# Altium PCB PCB_SHERPA_MK_I.PcbDoc
Units mm, origin at the board's own origin, x right, y up, seen from the top; angles counter-clockwise.
Board outline 63.63 x 47.24 mm, 4 copper layers (Top Layer, Mid-Layer 1, Mid-Layer 2, Bottom Layer); 104 components, 104 nets, 405 pads, 102 vias.
Unrouted connection lines stored in the file: 1.
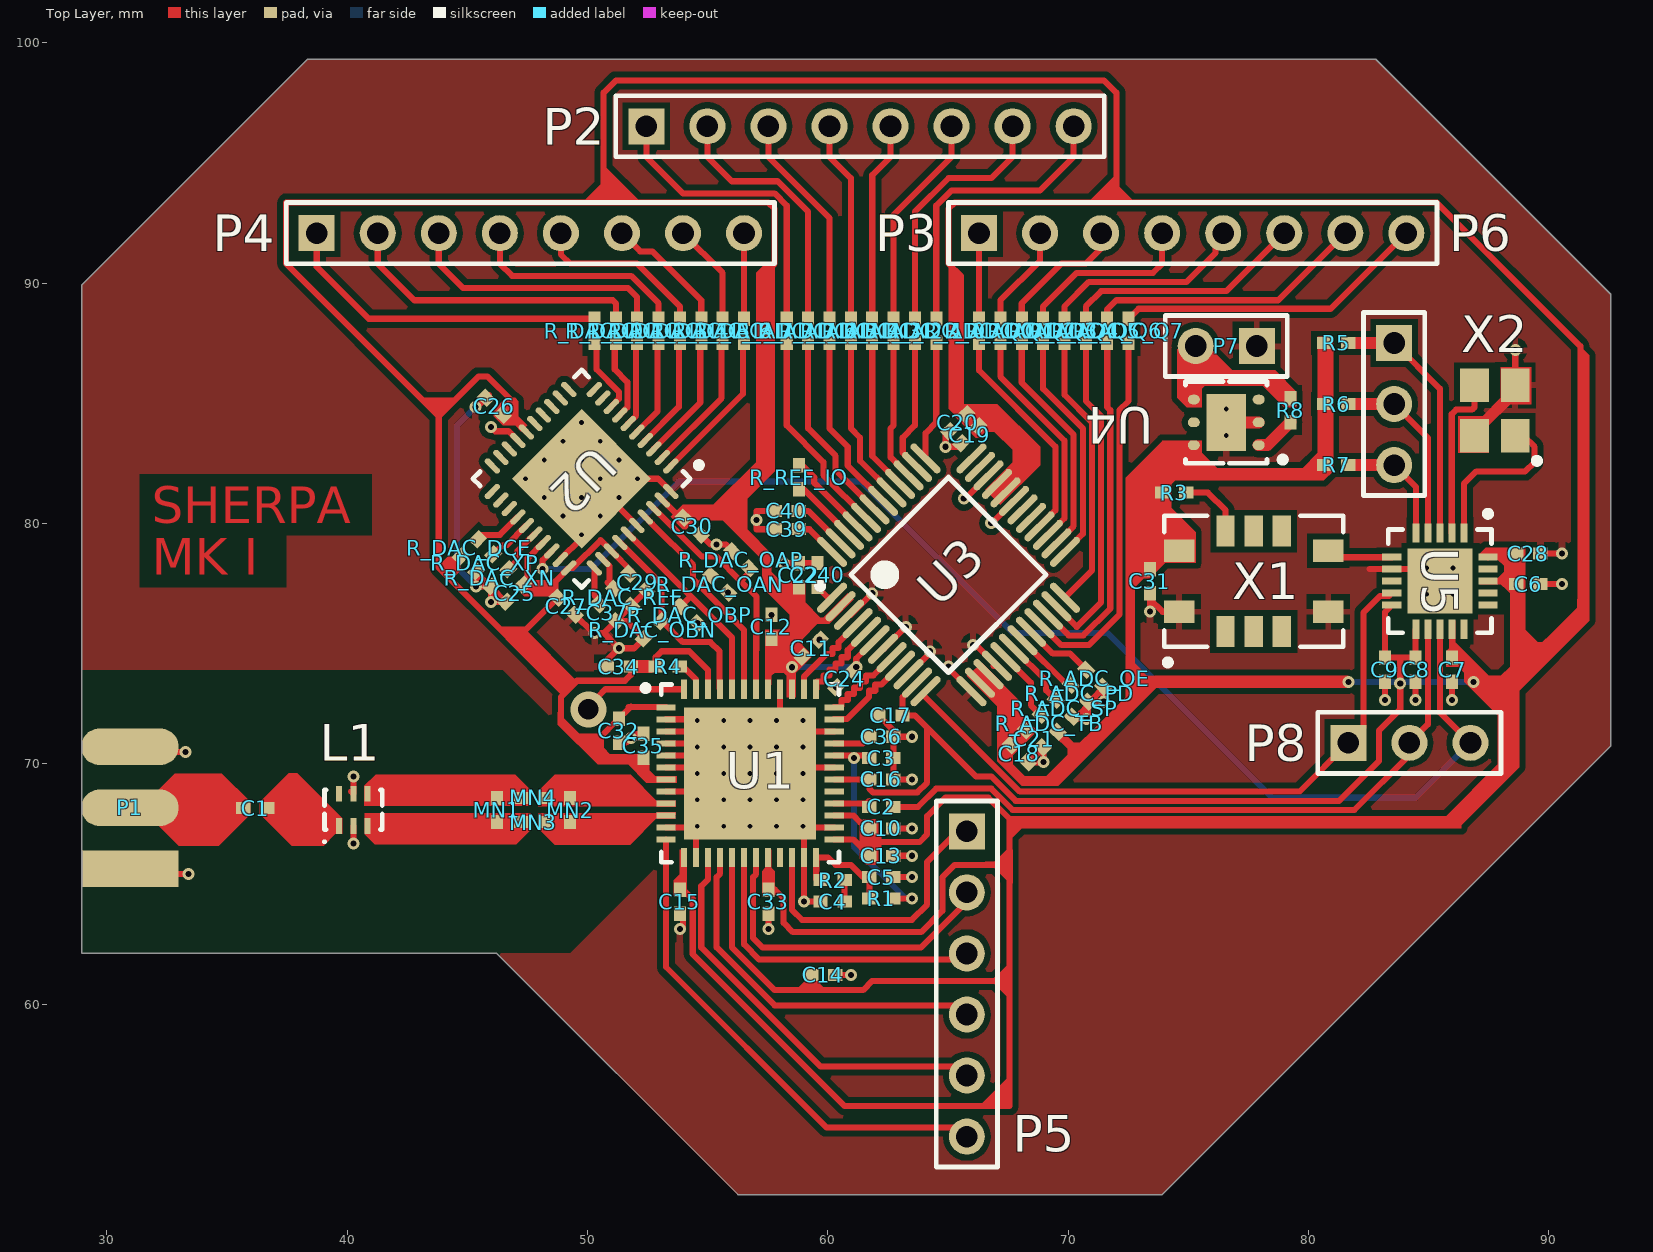
[diagram p0: Top Layer view]
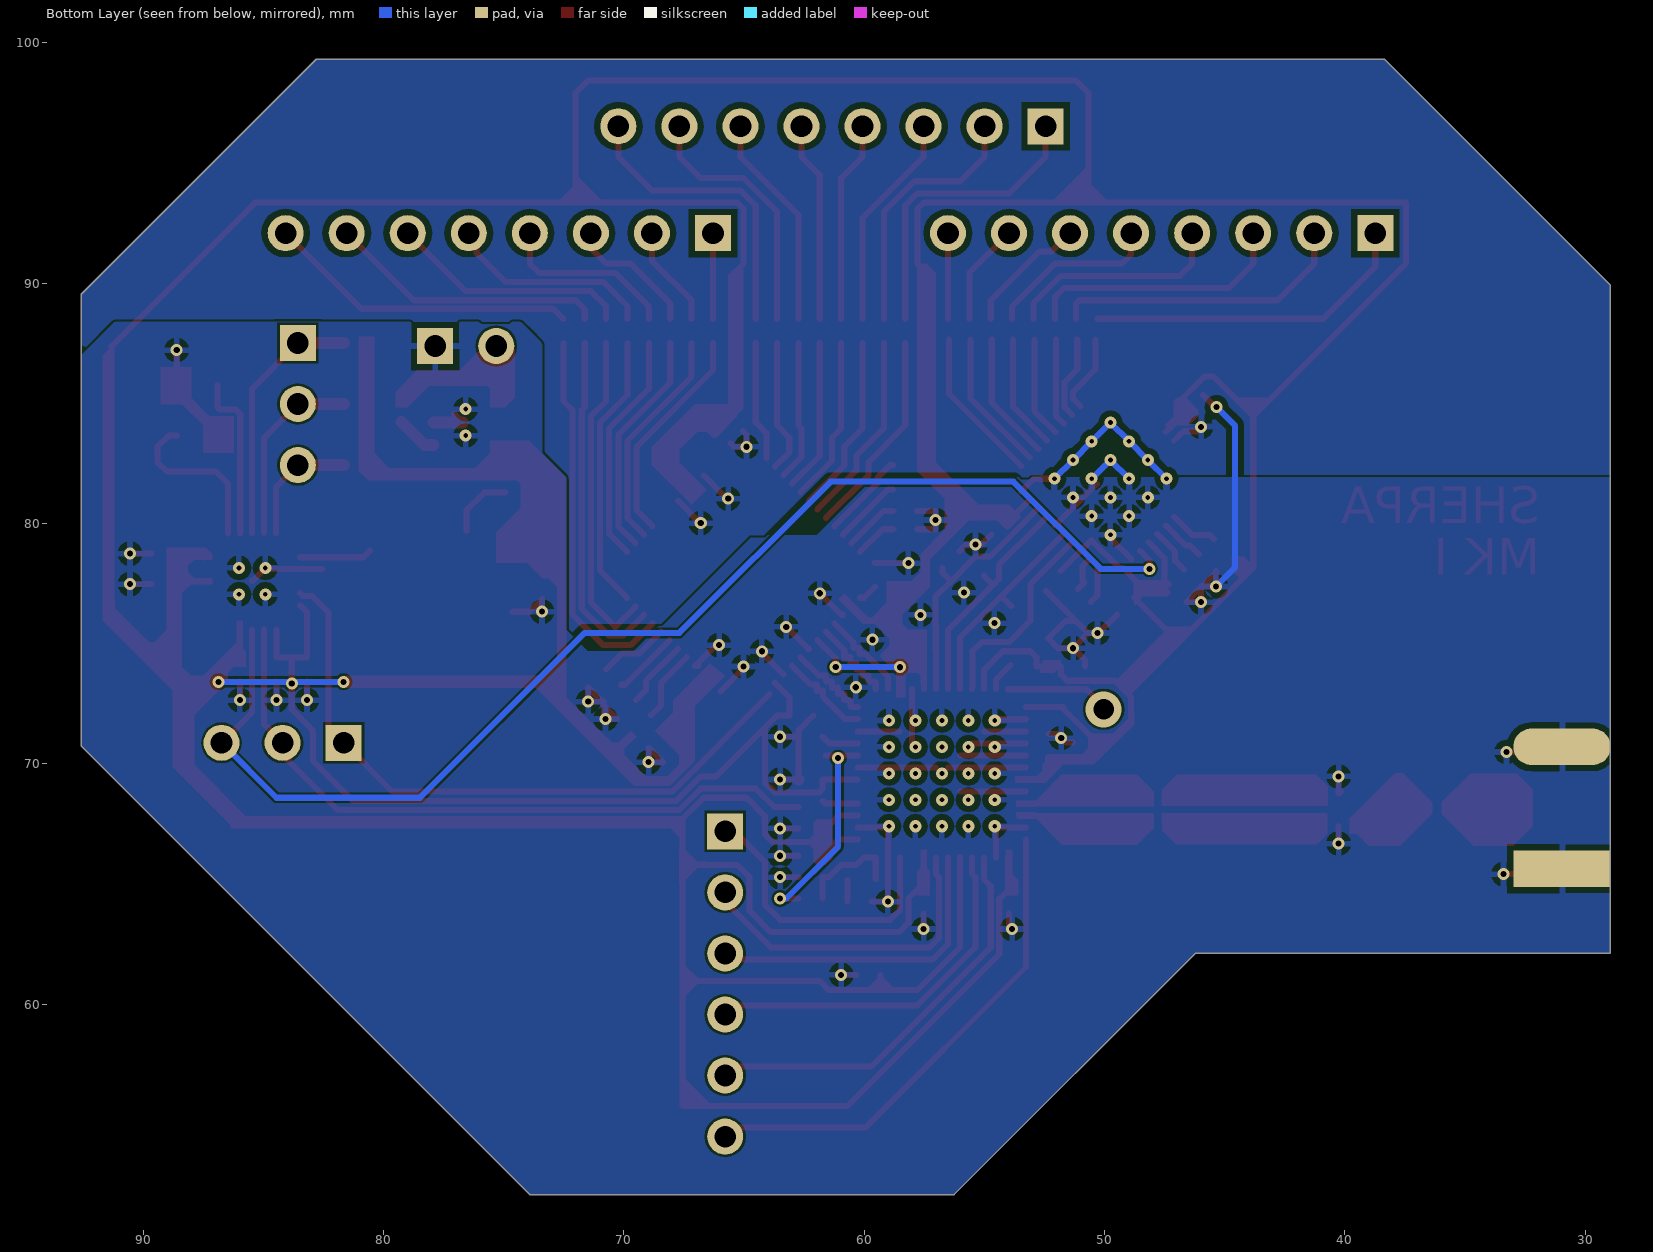
[diagram p1: Bottom Layer view, seen from below]

## Layer stack, top to bottom
Top Layer: signal copper 0.0356
Dielectric: core 0.32, FR-4, Dk 4.8
Mid-Layer 1: signal copper 0.0356
Dielectric: prepreg 0.32, FR-4, Dk 4.8
Mid-Layer 2: signal copper 0.0356
Dielectric: core 0.32, FR-4, Dk 4.8
Bottom Layer: signal copper 0.0356

## Board outline
28.956,87.376 28.956,89.916 38.354,99.314 80.899,99.314 82.804,99.314 92.583,89.535 92.583,70.739 73.914,52.07 56.261,52.07 46.228,62.103 28.956,62.103

## Design rules (kind name [scope] priority, off if disabled: settings)
Clearance [All] p1: gap=0.1
ComponentClearance [All] p1 off: gap=0.01 collisioncheckmode=3 verticalgap=0.254 showdistances=FALSE
DiffPairsRouting DiffPair_DiffPairsRouting_3 [InDifferentialPair ('ANT2')] p1: maxlimit=0.3 minlimit=0.1 mostfreqgap=0.3 midlayer1_mingap=0.254 midlayer1_maxgap=0.254 midlayer1_prefgap=0.254 midlayer2_mingap=0.254 midlayer2_maxgap=0.254 midlayer2_prefgap=0.254 maxuncoupledlength=12.7
MinimumSolderMaskSliver [All] p1 off: minsoldermaskwidth=0.1
PolygonConnect [All] p1: connectstyle=Relief reliefconductorwidth=0.254 reliefentries=4 polygonreliefangle="90 Angle" airgapwidth=0.254
RoomDefinition Schematic_SHERPA [InComponentClass('Schematic_SHERPA')] p1: confinementstyle=ConfineIn formatcopy=TRUE lockcomponents=FALSE outline 28.702,52.197 92.71,52.197 92.71,99.441 28.702,99.441
RoutingVias [All] p1 off: holewidth=0.711 width=1.27 viastyle="Through Hole" minholewidth=0.711 minwidth=1.27 maxholewidth=0.711 maxwidth=1.27
SilkToSolderMaskClearance [IsPad] p1 off: minsilkscreentomaskgap=0.1 clearancetoexposedcopper=TRUE
SolderMaskExpansion [All] p1: expansion=0.102
Width DiffPair_Width [InDifferentialPair('ANT2')] p1: maxlimit=1.3 minlimit=0.254 preferedwidth=1.3
Width [All] p2: maxlimit=5 minlimit=0.254 preferedwidth=0.254
24 further rules are at their usual default settings.

## Classes and differential pairs
differential pair ADC_IN_A: +ADC_IN_A_P -ADC_IN_A_N
differential pair ADC_IN_B: +ADC_IN_B_P -ADC_IN_B_N
differential pair DAC_OUT_A: +DAC_OUT_A_P -DAC_OUT_A_N
differential pair DAC_OUT_B: +DAC_OUT_B_P -DAC_OUT_B_N
differential pair CLK: +CLK_P -CLK_N
differential pair ANT2_BB: +ANT2_BB_P -ANT2_BB_N
differential pair ANT2: +ANT2_P -ANT2_N

## Components (designator, comment, footprint, x,y, rotation, side; value= is the part's Value field where it differs from the comment)
C1 "Cap Semi" 0402 36.171,68.155 r0 top
C2 "Cap Semi" 0402 62.23,68.199 r180 top
C3 "Cap Semi" 0402 62.23,70.231 r180 top
C4 "Cap Semi" 0402 60.198,64.262 r0 top
C5 "Cap Semi" 0402 62.23,65.278 r180 top
C6 "Cap Semi" 0402 89.154,77.47 r180 top
C7 "Cap Semi" 0402 85.979,73.914 r270 top
C8 "Cap Semi" 0402 84.455,73.914 r270 top
C9 "Cap Semi" 0402 83.185,73.914 r270 top
C10 "Cap Semi" 0402 62.23,67.31 r0 top
C11 "Cap Semi" 0402 59.309,74.803 r45 top
C12 "Cap Semi" 0402 57.658,75.692 r90 top
C13 "Cap Semi" 0402 62.23,66.167 r0 top
C14 "Cap Semi" 0402 59.817,61.214 r0 top
C15 "Cap Semi" 0402 53.848,64.262 r270 top
C16 "Cap Semi" 0402 62.23,69.342 r0 top
C17 "Cap Semi" 0402 62.611,72.009 r180 top
C18 "Cap Semi" 0402 67.963,70.409 r315 top
C19 "Cap Semi" 0402 65.913,83.685 r225 top
C20 "Cap Semi" 0402 65.405,84.193 r225 top
C21 "Cap Semi" 0402 68.586,71.043 r315 top
C22 "Cap Semi" 0402 58.801,77.843 r90 top
C24 "Cap Semi" 0402 60.706,73.533 r225 top
C25 "Cap Semi" 0402 46.972,77.096 r225 top
C26 "Cap Semi" 0402 46.132,84.866 r135 top
C27 "Cap Semi" 0402 49.127,76.558 r315 top
C28 "Cap Semi" 0402 89.154,78.74 r0 top
C29 "Cap Semi" 0402 52.091,77.545 r315 top
C30 "Cap Semi" 0402 54.356,79.883 r315 top
C31 "Cap Semi" 0402 73.406,77.597 r270 top
C32 "Cap Semi" 0402 51.308,71.374 r270 top
C33 "Cap Semi" 0402 57.531,64.262 r270 top
C34 "Cap Semi" 0402 51.308,74.041 r180 top
C35 "Cap Semi" 0402 52.324,70.739 r90 top
C36 "Cap Semi" 0402 62.23,71.12 r180 top
C37 "Cap Semi" 0402 50.833,76.288 r135 top
C39 "Cap Semi" 0402 58.293,79.756 r0 top
C40 "Cap Semi" 0402 58.293,80.518 r0 top
C240 "Cap Semi" 0402 59.563,77.851 r270 top
L1 "BALUN" BALUN 40.259,68.08 r90 top
MN1 "Cap Semi" 0402 46.228,68.072 r90 top
MN2 "Cap Semi" 0402 49.276,68.072 r90 top
MN3 "Cap Semi" 0402 47.752,67.564 r180 top
MN4 "Cap Semi" 0402 47.752,68.58 r180 top
P1 "SMA" "SMA Connector" 30.964,65.623 r90 top
P2 "Header 8" HDR1X8 52.451,96.52 r0 top
P3 "Header 8" HDR1X8 66.294,92.075 r0 top
P4 "Header 8" HDR1X8 38.735,92.075 r0 top
P5 "Header 6" HDR1X6 65.786,67.183 r270 top
P6 "Header 3" HDR1X3 83.566,87.503 r270 top
P7 "Header 2" HDR1X2 77.851,87.376 r180 top
P8 "Header 3" HDR1X3 81.661,70.866 r0 top
R1 "Res3" 0402 62.23,64.389 r0 top
R2 "Res3" 0402 60.198,65.151 r180 top
R3 "Res3" 0402 74.422,81.28 r180 top
R4 "Res3" 0402 53.34,74.041 r0 top
R5 "Res3" 0402 81.153,87.503 r0 top
R6 "Res3" 0402 81.153,84.963 r0 top
R7 "Res3" 0402 81.153,82.423 r0 top
R8 "Res3" 0402 79.248,84.709 r90 top
R_ADC_I0 "Res3" 0402 64.516,88.011 r270 top
R_ADC_I1 "Res3" 0402 63.627,88.011 r270 top
R_ADC_I2 "Res3" 0402 62.738,88.011 r270 top
R_ADC_I3 "Res3" 0402 61.849,88.011 r270 top
R_ADC_I4 "Res3" 0402 60.96,88.011 r270 top
R_ADC_I5 "Res3" 0402 60.071,88.011 r270 top
R_ADC_I6 "Res3" 0402 59.182,88.011 r270 top
R_ADC_I7 "Res3" 0402 58.293,88.011 r270 top
R_ADC_OE "Res3" 0402 71.101,73.557 r315 top
R_ADC_PD "Res3" 0402 70.472,72.929 r315 top
R_ADC_Q0 "Res3" 0402 66.294,88.011 r270 top
R_ADC_Q1 "Res3" 0402 67.183,88.011 r270 top
R_ADC_Q2 "Res3" 0402 68.072,88.011 r270 top
R_ADC_Q3 "Res3" 0402 68.961,88.011 r270 top
R_ADC_Q4 "Res3" 0402 69.85,88.011 r270 top
R_ADC_Q5 "Res3" 0402 70.739,88.011 r270 top
R_ADC_Q6 "Res3" 0402 71.628,88.011 r270 top
R_ADC_Q7 "Res3" 0402 72.517,88.011 r270 top
R_ADC_SP "Res3" 0402 69.844,72.3 r315 top
R_ADC_TB "Res3" 0402 69.215,71.672 r315 top
R_DAC_DCE "Res3" 0402 45.092,78.988 r225 top
R_DAC_I0 "Res3" 0402 50.292,88.011 r270 top
R_DAC_I1 "Res3" 0402 51.181,88.011 r270 top
R_DAC_I2 "Res3" 0402 52.07,88.011 r270 top
R_DAC_I3 "Res3" 0402 52.959,88.011 r270 top
R_DAC_I4 "Res3" 0402 53.848,88.011 r270 top
R_DAC_I5 "Res3" 0402 54.737,88.011 r270 top
R_DAC_I6 "Res3" 0402 55.626,88.011 r270 top
R_DAC_I7 "Res3" 0402 56.515,88.011 r270 top
R_DAC_OAN "Res3" 0402 55.499,77.47 r315 top
R_DAC_OAP "Res3" 0402 56.388,78.486 r135 top
R_DAC_OBN "Res3" 0402 52.705,75.565 r225 top
R_DAC_OBP "Res3" 0402 54.229,76.2 r315 top
R_DAC_REF "Res3" 0402 51.462,76.917 r315 top
R_DAC_XN "Res3" 0402 46.349,77.731 r225 top
R_DAC_XP "Res3" 0402 45.72,78.359 r225 top
R_REF_IO "Res3" 0402 58.801,81.915 r270 top
U1 "MAX2830" MAX2830 56.769,69.596 r0 top
U2 "MAX5851" MAX5851 49.756,81.856 r225 top
U3 "MAX1195" MAX1195 65.024,77.859 r45 top
U4 "LD39100PU33RY" LD39100PU33RY 76.581,84.201 r180 top
U5 "Si5351C" Si5351C 85.471,77.597 r270 top
X1 "7N-25.000MBP-T" 7N-25.000MBP-T 77.724,77.589 r90 top
X2 "XTAL" XTAL 87.757,84.701 r180 top

## Footprints (in the part's own frame and the unit in brackets; to place one, negate y for a bottom-side part, rotate by r counter-clockwise, add the part's x,y. Pads: shape width x height; smd on the part's side, far side on the other; paste and mask are expansions set on the pad)
7N-25.000MBP-T [mm]
  rect 1.28x0.76 smd: 1(-2.09,1.17) 2(-2.09,0) 3(-2.09,-1.17) 6(2.09,-1.17) 7(2.09,0) 8(2.09,1.17)
  rect 0.94x1.28 smd: 4(-1.27,-3.1) 5(1.27,-3.1) 9(1.27,3.1) 10(-1.27,3.1)
  silkscreen extent -3.5,-3.73 2.73,3.73, body extent -2.58,-3.58 2.57,3.57, height 2
0402 [mm] "Chip Capacitor, Body 1.0x0.5mm, IPC High Density"
  rect 0.6x0.5 smd: 1(-0.5,0) 2(0.5,0)
  body extent -0.55,-0.3 0.55,0.3, height 1.3
BALUN [mm]
  rect 0.65x0.25 smd: 1(-0.675,0.6) 2(-0.675,0) 3(-0.675,-0.6) 4(0.675,-0.6) 5(0.675,0) 6(0.675,0.6)
  silkscreen extent -1.37,-1.2 0.82,1.25, body extent -0.68,-1.05 0.67,1.05, height 0.95
HDR1X2 [mm] "Connector; Header; 2 Position"
  rect 1.5x1.5 hole 0.9: 1(0,0)
  round 1.5 hole 0.9: 2(2.54,0)
  silkscreen extent -1.27,-1.27 3.81,1.27
HDR1X3 [mm] "Connector; Header; 3 Position"
  rect 1.5x1.5 hole 0.9: 1(0,0)
  round 1.5 hole 0.9: 2(2.54,0) 3(5.08,0)
  silkscreen extent -1.27,-1.27 6.35,1.27
HDR1X6 [mm] "Connector; Header; 6 Position"
  rect 1.5x1.5 hole 0.9: 1(0,0)
  round 1.5 hole 0.9: 2(2.54,0) 3(5.08,0) 4(7.62,0) 5(10.16,0) 6(12.7,0)
  silkscreen extent -1.27,-1.27 13.97,1.27
HDR1X8 [mm] "Connector; Header; 8 Position"
  rect 1.5x1.5 hole 0.9: 1(0,0)
  round 1.5 hole 0.9: 2(2.54,0) 3(5.08,0) 4(7.62,0) 5(10.16,0) 6(12.7,0) 7(15.24,0) 8(17.78,0)
  silkscreen extent -1.27,-1.27 19.05,1.27
LD39100PU33RY [mm] "QFN, 6-Leads, Body 3.00x3.00mm, Pitch 0.95mm, Thermal Pad 2.37x1.63mm, IPC Medium Density"
  oval 0.5x0.4 smd: 1(-1.35,0.95) 2(-1.35,0) 3(-1.35,-0.95) 4(1.35,-0.95) 5(1.35,0) 6(1.35,0.95)
  rect 1.63x2.37 smd: 7(0,0)
  silkscreen extent -2.48,-1.7 1.7,1.7, body extent -1.43,-1.55 1.67,1.55, height 1
MAX1195 [mm] "TSQFP, 48-Leads, Body 7.00x7.00mm, Pitch 0.50mm, IPC Medium Density"
  oval 1.65x0.3 smd: 1(-4.1,2.75) 2(-4.1,2.25) 3(-4.1,1.75) 4(-4.1,1.25) 5(-4.1,0.75) 6(-4.1,0.25) 7(-4.1,-0.25) 8(-4.1,-0.75) 9(-4.1,-1.25) 10(-4.1,-1.75) 11(-4.1,-2.25) 12(-4.1,-2.75) 25(4.1,-2.75) 26(4.1,-2.25) 27(4.1,-1.75) 28(4.1,-1.25) 29(4.1,-0.75) 30(4.1,-0.25) 31(4.1,0.25) 32(4.1,0.75) 33(4.1,1.25) 34(4.1,1.75) 35(4.1,2.25) 36(4.1,2.75)
  oval 0.3x1.65 smd: 13(-2.75,-4.1) 14(-2.25,-4.1) 15(-1.75,-4.1) 16(-1.25,-4.1) 17(-0.75,-4.1) 18(-0.25,-4.1) 19(0.25,-4.1) 20(0.75,-4.1) 21(1.25,-4.1) 22(1.75,-4.1) 23(2.25,-4.1) 24(2.75,-4.1) 37(2.75,4.1) 38(2.25,4.1) 39(1.75,4.1) 40(1.25,4.1) 41(0.75,4.1) 42(0.25,4.1) 43(-0.25,4.1) 44(-0.75,4.1) 45(-1.25,4.1) 46(-1.75,4.1) 47(-2.25,4.1) 48(-2.75,4.1)
  silkscreen extent -4.22,-2.88 2.88,3.57, body extent -3.5,-3.5 3.5,3.5, height 1.2
MAX2830 [mm]
  rect 0.8x0.25 smd: 1(-3.5,2.75) 2(-3.5,2.25) 3(-3.5,1.75) 4(-3.5,1.25) 5(-3.5,0.75) 6(-3.5,0.25) 7(-3.5,-0.25) 8(-3.5,-0.75) 9(-3.5,-1.25) 10(-3.5,-1.75) 11(-3.5,-2.25) 12(-3.5,-2.75) 25(3.5,-2.75) 26(3.5,-2.25) 27(3.5,-1.75) 28(3.5,-1.25) 29(3.5,-0.75) 30(3.5,-0.25) 31(3.5,0.25) 32(3.5,0.75) 33(3.5,1.25) 34(3.5,1.75) 35(3.5,2.25) 36(3.5,2.75)
  rect 0.25x0.8 smd: 13(-2.75,-3.5) 14(-2.25,-3.5) 15(-1.75,-3.5) 16(-1.25,-3.5) 17(-0.75,-3.5) 18(-0.25,-3.5) 19(0.25,-3.5) 20(0.75,-3.5) 21(1.25,-3.5) 22(1.75,-3.5) 23(2.25,-3.5) 24(2.75,-3.5) 37(2.75,3.5) 38(2.25,3.5) 39(1.75,3.5) 40(1.25,3.5) 41(0.75,3.5) 42(0.25,3.5) 43(-0.25,3.5) 44(-0.75,3.5) 45(-1.25,3.5) 46(-1.75,3.5) 47(-2.25,3.5) 48(-2.75,3.5)
  rect 5.5x5.5 smd: 49(0,0)
  silkscreen extent -4.47,-3.7 3.7,3.7, body extent -3.55,-3.55 3.55,3.55, height 0.8
MAX5851 [mm]
  oval 0.8x0.25 smd: 1(-3,2.25) 2(-3,1.75) 3(-3,1.25) 4(-3,0.75) 5(-3,0.25) 6(-3,-0.25) 7(-3,-0.75) 8(-3,-1.25) 9(-3,-1.75) 10(-3,-2.25) 21(3,-2.25) 22(3,-1.75) 23(3,-1.25) 24(3,-0.75) 25(3,-0.25) 26(3,0.25) 27(3,0.75) 28(3,1.25) 29(3,1.75) 30(3,2.25)
  oval 0.25x0.8 smd: 11(-2.25,-3) 12(-1.75,-3) 13(-1.25,-3) 14(-0.75,-3) 15(-0.25,-3) 16(0.25,-3) 17(0.75,-3) 18(1.25,-3) 19(1.75,-3) 20(2.25,-3) 31(2.25,3) 32(1.75,3) 33(1.25,3) 34(0.75,3) 35(0.25,3) 36(-0.25,3) 37(-0.75,3) 38(-1.25,3) 39(-1.75,3) 40(-2.25,3)
  rect 4.1x4.1 smd: 41(0,0)
  silkscreen extent -3.97,-3.2 3.2,3.2, body extent -3.05,-3.05 3.05,3.05, height 0.8
Si5351C [mm]
  rect 0.8x0.3 smd: 1(-2,1) 2(-2,0.5) 3(-2,0) 4(-2,-0.5) 5(-2,-1) 11(2,-1) 12(2,-0.5) 13(2,0) 14(2,0.5) 15(2,1)
  rect 0.3x0.8 smd: 6(-1,-2) 7(-0.5,-2) 8(0,-2) 9(0.5,-2) 10(1,-2) 16(1,2) 17(0.5,2) 18(0,2) 19(-0.5,2) 20(-1,2)
  rect 2.7x2.7 smd: 21(0,0)
  silkscreen extent -2.92,-2.15 2.15,2.15, body extent -2,-2 2,2, height 0.9
"SMA Connector" [mm]
  rect 1.52x4.06 smd: GND(0,0)
  rect 1.52x4.06 smd far side: GND(0,0)
  oval 1.52x4.06 smd: GND(5.08,0) SIGNAL(2.54,0)
  oval 1.52x4.06 smd far side: GND(5.08,0)
XTAL [mm]
  rect 1.2x1.4 smd: GND(-0.85,-1.05) GND(0.85,1.05) XA(-0.85,1.05) XB(0.85,-1.05)
  silkscreen extent -1.88,1.98 -1.63,2.22, body extent -1.3,-1.65 1.3,1.65, height 0.8

## Part data
C1 C2 C3 C4 C5 C6 C7 C8 C9 C10 C11 C12 C13 C14 C15 C16 C17 C18 C19 C20 C21 C22 C24 C25 C26 C27 C28 C29 C30 C31 C32 C33 C34 C35 C36 C37 C39 C40 C240 MN1 MN2 MN3 MN4: "Capacitor (Semiconductor SIM Model)"
P1: library part BNC, "BNC Elbow Connector"
P2 P3 P4: "Header, 8-Pin"
P5: "Header, 6-Pin"
P6 P8: "Header, 3-Pin"
P7: "Header, 2-Pin"
R1 R2 R3 R4 R5 R6 R7 R8 R_ADC_I0 R_ADC_I1 R_ADC_I2 R_ADC_I3 R_ADC_I4 R_ADC_I5 R_ADC_I6 R_ADC_I7 R_ADC_OE R_ADC_PD R_ADC_Q0 R_ADC_Q1 R_ADC_Q2 R_ADC_Q3 R_ADC_Q4 R_ADC_Q5 R_ADC_Q6 R_ADC_Q7 R_ADC_SP R_ADC_TB R_DAC_DCE R_DAC_I0 R_DAC_I1 R_DAC_I2 R_DAC_I3 R_DAC_I4 R_DAC_I5 R_DAC_I6 R_DAC_I7 R_DAC_OAN R_DAC_OAP R_DAC_OBN R_DAC_OBP R_DAC_REF R_DAC_XN R_DAC_XP R_REF_IO: "Resistor"

## Via types
v1: diameter 0.5, hole 0.254, Top Layer to Bottom Layer, 54 vias
v2: diameter 0.5, hole 0.2, Top Layer to Bottom Layer, 47 vias
v3: diameter 1.5, hole 0.85, Top Layer to Bottom Layer, 1 vias

## Nets (pads, with @x,y where several pads share a name; then routed paths per layer and width w, separated by ;. In a path a pad name is that pad's centre, name@x,y a point inside that pad or via, vN(x,y) a via of type N, cw(c..) or ccw(c..) an arc to the next point about the centre after c; other vN are vias at no path point)
ADC_CLK: P8.1 U3.12 U5.9 | length 27.4
  Top Layer w0.254: U3.12@63.942,72.888 67.997,68.834 79.629,68.834 P8.1 82.296,71.501 82.296,76.293 82.977,76.974 83.348,76.974 U5.9
ADC_IN_A_N: U1.37 U3.5 | length 4
  Top Layer w0.254: U1.37@59.519,73.104 59.519,73.37 59.563,73.414 59.817,73.414 59.817,73.668 60.071,73.668 60.071,73.922 60.325,73.922 60.325,74.176 60.579,74.176 60.579,74.43 60.833,74.43 60.833,74.729 U3.5
ADC_IN_A_P: U1.38 U3.4 | length 3.9
  Top Layer w0.254: U1.38@59.019,73.104 59.019,73.622 ; 59.019,73.632 59.944,74.557 60.198,74.557 60.198,74.811 60.452,74.811 60.452,75.055 U3.4
ADC_IN_B_N: U1.36 U3.8 | length 4
  Top Layer w0.254: U1.36@60.269,72.354 60.535,72.354 60.579,72.398 60.579,72.652 60.833,72.652 60.833,72.906 61.087,72.906 61.087,73.16 61.341,73.16 61.341,73.414 61.595,73.414 61.595,73.668 61.894,73.668 U3.8
ADC_IN_B_P: U1.35 U3.9 | length 4
  Top Layer w0.254: U1.35@60.269,71.854 60.787,71.854 ; 60.797,71.854 61.722,72.779 61.722,73.033 61.976,73.033 61.976,73.287 62.23,73.287 63.009,74.066 U3.9
ANT2_BB_N: L1.3 MN1.1 MN3.2
ANT2_BB_P: L1.4 MN1.2 MN4.2
ANT2_N: MN2.1 MN3.1 U1.10 | length 1
  Top Layer w0.254: MN3.1 MN2.1@49.268,67.564
ANT2_P: MN2.2 MN4.1 U1.9 | length 1
  Top Layer w0.254: MN4.1@48.26,68.572 MN2.2
CLK_N: U5.2 X2.XB | length 6.9
  Top Layer w0.254: U5.2@85.963,79.597 85.963,84.546 86.149,84.732 86.811,84.732 86.907,84.828 X2.XB ; U5.2@85.971,79.589 U5.2
CLK_P: U5.1 X2.XA | length 7
  Top Layer w0.254: U5.1@86.471,79.589 U5.1 86.471,81.645 86.987,82.161 89.019,82.161 89.408,82.55 89.408,83.177 88.934,83.651 X2.XA
CS: P5.5 U1.15 | length 17
  Top Layer w0.254: U1.15 55.019,65.186 54.737,64.904 54.737,62.357 59.69,57.404 P5.5@65.786,57.404
DAC_CLK: P8.3 U2.28 U5.13 | length 52.7
  Top Layer w0.254: v1(48.133,78.105) 48.133,78.465 U2.28 ; U5.13@85.471,75.589 85.471,72.136 P8.3
  Bottom Layer w0.254: v1(48.133,78.105) 50.165,78.105 53.797,81.737 61.392,81.737 67.691,75.438 71.628,75.438 78.486,68.58 84.455,68.58 P8.3
DAC_OUT_A_N: R_DAC_OAN.1 U1.43 U2.37 | length 9.4
  Top Layer w0.254: U2.37 52.705,79.967 54.398,78.274 54.398,77.682 54.637,77.443 ; 54.622,77.427 54.637,77.443 ; R_DAC_OAN.1@55.018,77.824 54.637,77.443 ; 56.511,74.934 56.511,75.569 54.637,77.443 ; U1.43@56.519,73.104 56.519,74.934
DAC_OUT_A_P: R_DAC_OAP.1 U1.42 U2.38 | length 11.5
  Top Layer w0.254: U2.38 54.767,78.613 55.372,78.613 56.388,77.597 ; R_DAC_OAP.1 56.742,77.951 56.388,77.597 ; U1.42@57.019,73.104 57.019,75.88 ; 57.027,74.737 57.027,76.958 56.388,77.597
DAC_OUT_B_N: R_DAC_OBN.1 U1.45 U2.34 | length 8.5
  Top Layer w0.254: U2.34 53.086,77.465 53.086,75.946 53.975,75.057 55.118,75.057 55.499,74.676 55.499,73.124 U1.45@55.519,73.104
DAC_OUT_B_P: R_DAC_OBP.1 U1.44 U2.35 | length 8.8
  Top Layer w0.254: U2.35 54.296,76.962 ; R_DAC_OBP.1 53.888,76.554 54.296,76.962 ; U1.44@56.019,73.104 56.019,75.239 54.296,76.962
DIN: P5.2 U1.19 | length 14
  Top Layer w0.254: U1.19 57.019,65.401 56.896,65.278 56.896,62.738 57.277,62.357 63.881,62.357 65.786,64.262 P5.2 P5.2@65.786,65.024
GND: C3.1 C4.1 C5.1 C6.1 C7.2 C8.2 C9.2 C10.2 C11.2 C12.2 C13.2 C14.2 C15.2 C16.2 C17.2 C18.2 C21.2 C22.2 C24.2 C25.2 C26.2 C27.2 C28.2 C29.2 C30.2 C31.2 C32.2 C33.2 C34.2 C35.2 C36.1 C37.1 C39.1 C40.1 C240.1 L1.2 L1.5 P1.GND P7.1 R_ADC_OE.2 R_ADC_PD.2 R_ADC_SP.2 R_DAC_OAN.2 R_DAC_OAP.2 R_DAC_OBN.2 R_DAC_OBP.2 R_DAC_REF.2 R_DAC_XN.2 R_DAC_XP.2 U1.2 U1.3 U1.4 U1.5 U1.6 U1.8 U1.11 U1.14 U1.21 U1.23 U1.26 U1.31 U1.34 U1.40 U1.49 U2.29 U2.36 U2.40 U2.41 U3.3 U3.7 U3.10 U3.13 U3.16 U4.2 U4.7 U5.7 U5.21 X1.4 X1.10 X2.GND | length 115.2
  Top Layer w0.254: P1.GND@30.964,65.623 31.182,65.405 v1(33.401,65.405) ; P1.GND@30.964,70.703 31.182,70.485 v1(33.274,70.485) ; L1.5@40.165,68.849 L1.5 v1(40.259,69.469) ; v1(40.259,66.675) L1.2 ; v1(45.339,84.836) 45.395,84.836 C26.2@45.906,85.347 ; R_DAC_XP.2@45.344,77.978 R_DAC_XP.2@45.367,77.955 ; R_DAC_XP.2 R_DAC_XP.2@45.367,77.955 ; U2.29 U2.41@49.756,79.381 ; C27.2 50.247,75.438 v1(50.292,75.438) 50.69,75.438 C37.1 ; U2.41@50.322,81.644 U2.36 ; 50.69,75.421 v1(51.308,74.803) ; C34.2 50.808,74.303 v1(51.308,74.803) ; C32.2 51.612,70.874 v1(51.804,71.066) 51.977,71.239 C35.2 ; v2(52.089,81.856) 52.938,81.856 U2.40 ; C29.2 R_DAC_REF.2 C37.1 ; U1.11 54.519,67.346 U1.14 ; U1.8 U1.49@56.019,68.846 ; U1.6 U1.49@56.519,69.846 ; U1.5 U1.49@56.019,70.346 ; U1.4 U1.49@55.519,70.846 ; U1.3 U1.49@55.019,71.346 ; U1.2 U1.49@54.519,71.846 ; v1@53.975,63.119 C15.2@53.975,63.762 ; C30.2 55.118,79.121 v1(55.372,79.121) 55.753,79.121 R_DAC_OAP.2 ; U1.49@57.019,69.846 U1.31 ; v1(57.531,63.119) C33.2 ; C39.1 57.031,79.756 v1(57.031,80.137) 57.031,80.518 C40.1 ; U1.49@58.019,70.846 U1.40 ; v1@58.174,78.351 C240.1 ; U1.49@58.519,71.346 U1.34 ; C4.1 v1(59.019,64.262) U1.23 59.019,67.346 U1.26 ; C14.2 v1(60.96,61.214) ; U3.3 60.957,76.197 v1(61.849,77.089) ; C17.2 62.73,71.39 C36.1 ; U3.7 62.337,74.783 v1(63.246,75.692) ; C5.1 v1(63.5,65.278) ; C13.2@62.865,66.167 C13.2 v1(63.5,66.167) ; C10.2@62.992,67.31 C10.2 v1(63.5,67.31) ; C16.2@62.992,69.342 C16.2 ; U3.10 64.262,74.622 v1(64.262,74.676) ; v1(63.5,69.342) C16.2 ; v1(63.5,71.12) C36.1 ; v1(65.024,74.041) 65.024,73.97 U3.13 ; v1(66.04,74.93) 66.185,74.93 U3.16 U3.16@66.894,74.076 ; v1@68.961,70.055 68.366,70.055 68.97,70.659 v1(68.97,70.064) ; v1(70.766,71.86) 70.284,71.86 70.525,72.101 70.826,72.402 v1@70.826,71.92 ; R_ADC_PD.2 70.829,72.579 v1(71.484,72.579) 71.484,73.174 R_ADC_PD.2@70.979,72.668 ; v1(73.406,76.327) 73.406,76.581 73.406,76.843 73.93,76.319 X1.10 ; U4.7 76.706,84.201 U4.7@77.058,84.553 ; P7.1 P7.1@77.851,87.757 ; 82.55,78.105 82.558,78.097 U5.7 84.971,78.097 U5.21 ; v1(83.185,72.644) C9.2 ; v1(84.455,72.644) C8.2 ; v1(85.979,72.644) C7.2 ; X2.GND@86.907,83.651 87.503,84.247 87.503,84.328 88.607,85.432 88.607,85.751 v1(88.607,87.21) ; C6.1 v1(90.551,77.47) ; C28.2 v1(90.551,78.74) ; R_DAC_XP.2@45.367,77.955 R_DAC_XN.2@45.951,77.371 ; R_DAC_XP.2@45.367,77.955 v1(45.367,77.371) R_DAC_XN.2@45.951,77.371 ; R_DAC_XN.2@45.951,77.371 45.989,77.371 R_DAC_XN.2@45.989,77.333 ; R_DAC_XN.2@45.951,77.371 R_DAC_XN.2@45.989,77.333 ; R_DAC_XN.2@45.989,77.333 v1(45.989,76.723) 46.599,76.723 R_DAC_XN.2@45.989,77.333 ; C37.1 51.628,75.935 R_DAC_OBN.2 51.943,74.803 v1(51.308,74.803) ; C16.2 C36.1
  Top Layer w0.5: U4.7@76.706,84.201 U4.2
  Bottom Layer w0.254: v1(45.339,84.836) 44.577,84.074 44.577,78.161 v1(45.367,77.371) ; v2(47.422,81.856) v2(48.2,82.634) v2(48.978,83.412) v2(49.756,84.189) v2(50.534,83.412) v2(51.311,82.634) v2(52.089,81.856) ; v2(48.978,81.856) v2(49.756,82.634) v2(50.534,81.856)
  other v1: 53.848,63.119 60.352,73.179 59.663,75.157 54.583,75.846 57.658,76.192 55.853,77.116 58.166,78.343
  other v2: 54.569,67.396 55.669,67.396 56.769,67.396 57.869,67.396 58.969,67.396 54.569,68.496 55.669,68.496 56.769,68.496 57.869,68.496 58.969,68.496 54.569,69.596 55.669,69.596 56.769,69.596 57.869,69.596 58.969,69.596 54.569,70.696 55.669,70.696 56.769,70.696 57.869,70.696 58.969,70.696 54.569,71.796 55.669,71.796 56.769,71.796 57.869,71.796 58.969,71.796 84.921,77.047 86.021,77.047 84.921,78.147 86.021,78.147 49.756,79.523 48.978,80.3 50.534,80.3 48.2,81.078 49.756,81.078 51.311,81.078 76.581,83.651 76.581,84.751
INTR: P6.1 R5.2 U5.3 | length 10.6
  Top Layer w0.254: P6.1 85.471,85.598 U5.3
  Top Layer w0.5: R5.2 P6.1
LD: P5.1 U1.22 | length 12.3
  Top Layer w0.254: U1.22 58.519,63.909 58.928,63.5 63.5,63.5 64.135,64.135 64.135,65.913 P5.1@65.786,67.564
MAX2830_CLOCK: C2.1 P8.2 U5.12 | length 28.7
  Top Layer w0.254: C2.1 63.754,68.199 64.516,68.961 66.802,68.961 67.691,68.072 81.915,68.072 84.201,70.358 P8.2 84.971,71.636 U5.12@84.971,75.589
NetC1_1: C1.1 P1.SIGNAL
NetC1_2: C1.2 L1.1
NetC2_2: C2.2 U1.28 | length 1.5
  Top Layer w0.254: U1.28 61.623,68.346 61.73,68.453
NetC3_2: C3.2 R1.2 U1.32 | length 9.1
  Top Layer w0.254: U1.32 C3.2@61.607,70.346 ; R1.2 v1(63.5,64.389)
  Bottom Layer w0.254: v1(61.087,70.231) 61.087,66.548 63.246,64.389 v1(63.5,64.389)
NetC4_2: C4.2 R2.1 | length 0.9
  Top Layer w0.254: C4.2 R2.1
NetC5_2: C5.2 R1.1 R2.2 U1.24 | length 4.3
  Top Layer w0.254: R2.2@59.519,65.195 U1.24 60.015,66.096 60.325,65.786 60.96,65.786 61.468,65.278 C5.2 R1.1
NetC36_2: C36.2 U1.33 | length 1.6
  Top Layer w0.254: U1.33 61.456,70.846 C36.2
NetC37_2: C37.2 U2.31 | length 1.5
  Top Layer w0.254: U2.31 50.286,77.015 C37.2@50.57,76.732
NetC39_2: C39.2 U3.48 | length 1.8
  Top Layer w0.254: C39.2 59.238,79.756 U3.48
NetC40_2: C40.2 U3.47 | length 2.3
  Top Layer w0.254: C40.2 59.183,80.518 U3.47
NetC240_2: C240.2 U3.1 | length 0.8
  Top Layer w0.254: C240.2 60.01,76.904 U3.1
NetP2_1: P2.1 R_ADC_I7.1 | length 12.7
  Top Layer w0.254: P2.1 52.451,95.25 53.975,93.726 57.785,93.726 58.293,93.218 R_ADC_I7.1
NetP2_2: P2.2 R_ADC_I6.1 | length 10.9
  Top Layer w0.254: P2.2 54.991,95.25 56.007,94.234 57.912,94.234 59.182,92.964 R_ADC_I6.1
NetP2_3: P2.3 R_ADC_I5.1 | length 9.1
  Top Layer w0.254: P2.3 57.531,95.25 60.071,92.71 R_ADC_I5.1
NetP2_4: P2.4 R_ADC_I4.1 | length 8.4
  Top Layer w0.254: P2.4 60.071,95.25 60.96,94.361 R_ADC_I4.1
NetP2_5: P2.5 R_ADC_I3.1 | length 8.3
  Top Layer w0.254: R_ADC_I3.1 61.849,94.488 62.611,95.25 P2.5
NetP2_6: P2.6 R_ADC_I2.1 | length 9
  Top Layer w0.254: R_ADC_I2.1 62.738,92.837 65.151,95.25 P2.6
NetP2_7: P2.7 R_ADC_I1.1 | length 10.7
  Top Layer w0.254: R_ADC_I1.1 63.627,92.964 65.024,94.361 66.802,94.361 67.691,95.25 P2.7
NetP2_8: P2.8 R_ADC_I0.1 | length 12.5
  Top Layer w0.254: R_ADC_I0.1 64.516,93.218 65.151,93.853 68.834,93.853 70.231,95.25 P2.8
NetP3_1: P3.1 R_ADC_Q0.1 | length 3.6
  Top Layer w0.254: R_ADC_Q0.1 P3.1
NetP3_2: P3.2 R_ADC_Q1.1 | length 4.2
  Top Layer w0.254: R_ADC_Q1.1 67.183,89.281 68.834,90.932 P3.2
NetP3_3: P3.3 R_ADC_Q2.1 | length 5.5
  Top Layer w0.254: R_ADC_Q2.1 68.072,89.154 69.723,90.805 70.739,90.805 71.374,91.44 P3.3
NetP3_4: P3.4 R_ADC_Q3.1 | length 7.5
  Top Layer w0.254: R_ADC_Q3.1 68.961,89.027 70.358,90.424 73.533,90.424 73.914,90.805 P3.4
NetP3_5: P3.5 R_ADC_Q4.1 | length 8.7
  Top Layer w0.254: R_ADC_Q4.1 69.85,89.027 70.866,90.043 74.93,90.043 76.136,91.249 76.136,91.757 P3.5
NetP3_6: P3.6 R_ADC_Q5.1 | length 10
  Top Layer w0.254: R_ADC_Q5.1 70.739,89.027 71.374,89.662 76.581,89.662 P3.6
NetP3_7: P3.7 R_ADC_Q6.1 | length 11.6
  Top Layer w0.254: R_ADC_Q6.1 71.628,88.9 72.009,89.281 78.74,89.281 P3.7
NetP3_8: P3.8 R_ADC_Q7.1 | length 13
  Top Layer w0.254: R_ADC_Q7.1 72.933,88.927 80.926,88.927 P3.8
NetP4_1: P4.1 R_DAC_I0.1 | length 13.9
  Top Layer w0.254: P4.1 38.735,90.678 40.902,88.511 R_DAC_I0.1
NetP4_2: P4.2 R_DAC_I1.1 | length 12.5
  Top Layer w0.254: P4.2 41.275,90.805 42.799,89.281 51.054,89.281 51.181,89.154 R_DAC_I1.1
NetP4_3: P4.3 R_DAC_I2.1 | length 11
  Top Layer w0.254: P4.3 43.815,90.805 44.831,89.789 51.689,89.789 52.07,89.408 R_DAC_I2.1
NetP4_4: P4.4 R_DAC_I3.1 | length 9.2
  Top Layer w0.254: P4.4 46.355,90.805 46.863,90.297 51.816,90.297 52.959,89.154 R_DAC_I3.1
NetP4_5: P4.5 R_DAC_I4.1 | length 7.3
  Top Layer w0.254: P4.5 48.895,91.186 49.276,90.805 52.07,90.805 53.848,89.027 R_DAC_I4.1
NetP4_6: P4.6 R_DAC_I5.1 | length 5.2
  Top Layer w0.254: P4.6 52.197,91.313 52.705,91.313 54.737,89.281 R_DAC_I5.1
NetP4_7: P4.7 R_DAC_I6.1 | length 4.2
  Top Layer w0.254: P4.7 55.626,90.424 R_DAC_I6.1
NetP4_8: P4.8 R_DAC_I7.1 | length 3.6
  Top Layer w0.254: R_DAC_I7.1 P4.8
NetR3_1: R3.1 X1.8 | length 2.8
  Top Layer w0.254: R3.1 75.819,81.28 76.554,80.545 X1.8
NetR4_2: R4.2 U1.47 | length 1.3
  Top Layer w0.254: R4.2@53.907,74.109 54.519,73.497 U1.47@54.519,73.104
NetR8_1: R8.1 U4.1 | length 1.7
  Top Layer w0.5: U4.1 78.29,83.251 R8.1
NetR_ADC_I0_2: R_ADC_I0.2 U3.37 | length 5
  Top Layer w0.254: U3.37 64.069,83.754 64.516,84.201 R_ADC_I0.2
NetR_ADC_I1_2: R_ADC_I1.2 U3.38 | length 5.6
  Top Layer w0.254: R_ADC_I1.2 63.627,84.074 63.119,83.566 63.119,82.946 U3.38
NetR_ADC_I2_2: R_ADC_I2.2 U3.39 | length 5.9
  Top Layer w0.254: R_ADC_I2.2 62.738,84.074 62.611,83.947 62.611,82.747 U3.39
NetR_ADC_I3_2: R_ADC_I3.2 U3.40 | length 6.3
  Top Layer w0.254: R_ADC_I3.2 61.849,83.439 61.849,82.802 U3.40
NetR_ADC_I4_2: R_ADC_I4.2 U3.41 | length 6.9
  Top Layer w0.254: R_ADC_I4.2 60.96,83.947 61.341,83.566 61.341,82.603 U3.41
NetR_ADC_I5_2: R_ADC_I5.2 U3.42 | length 7.5
  Top Layer w0.254: R_ADC_I5.2 60.071,83.947 60.833,83.185 60.833,82.404 U3.42
NetR_ADC_I6_2: R_ADC_I6.2 U3.43 | length 8.1
  Top Layer w0.254: R_ADC_I6.2 59.182,83.947 60.325,82.804 60.325,82.204 U3.43
NetR_ADC_I7_2: R_ADC_I7.2 U3.44 | length 8.7
  Top Layer w0.254: R_ADC_I7.2 58.293,84.074 59.817,82.55 59.817,82.005 U3.44
NetR_ADC_OE_1: R_ADC_OE.1 U3.20 | length 2.9
  Top Layer w0.254: U3.20 69.368,74.576 70.082,74.576 R_ADC_OE.1
NetR_ADC_PD_1: R_ADC_PD.1 U3.19 | length 2.8
  Top Layer w0.254: U3.19 69.954,73.282 R_ADC_PD.1
NetR_ADC_Q0_2: R_ADC_Q0.2 U3.28 | length 9.2
  Top Layer w0.254: R_ADC_Q0.2 66.294,86.36 69.469,83.185 69.469,80.536 U3.28
NetR_ADC_Q1_2: R_ADC_Q1.2 U3.27 | length 9.4
  Top Layer w0.254: R_ADC_Q1.2 67.183,86.106 69.85,83.439 69.85,80.21 U3.27
NetR_ADC_Q2_2: R_ADC_Q2.2 U3.26 | length 9.5
  Top Layer w0.254: R_ADC_Q2.2 68.072,85.852 70.231,83.693 70.231,79.884 U3.26
NetR_ADC_Q3_2: R_ADC_Q3.2 U3.25 | length 9.7
  Top Layer w0.254: R_ADC_Q3.2 68.961,85.598 70.612,83.947 70.612,79.558 U3.25
NetR_ADC_Q4_2: R_ADC_Q4.2 U3.24 | length 11.5
  Top Layer w0.254: R_ADC_Q4.2 69.85,85.344 70.993,84.201 70.993,78.03 U3.24
NetR_ADC_Q5_2: R_ADC_Q5.2 U3.23 | length 13.7
  Top Layer w0.254: U3.23 69.514,76.536 70.358,75.692 71.374,76.708 71.374,84.455 70.739,85.09 R_ADC_Q5.2
NetR_ADC_Q6_2: R_ADC_Q6.2 U3.22 | length 14.5
  Top Layer w0.254: U3.22 70.02,75.338 70.639,75.338 71.755,76.454 71.755,84.709 71.628,84.836 R_ADC_Q6.2
NetR_ADC_Q7_2: R_ADC_Q7.2 U3.21 | length 15.7
  Top Layer w0.254: U3.21 69.721,74.93 70.866,74.93 72.136,76.2 72.136,84.709 72.517,85.09 R_ADC_Q7.2
NetR_ADC_SP_1: R_ADC_SP.1 U3.18 | length 2.9
  Top Layer w0.254: U3.18 69.088,73.441 69.088,73.056 R_ADC_SP.1
NetR_ADC_TB_1: R_ADC_TB.1 U3.17 | length 3
  Top Layer w0.254: U3.17 68.453,73.369 68.453,72.434 R_ADC_TB.1
NetR_DAC_DCE_1: R_DAC_DCE.1 U2.24 | length 2
  Top Layer w0.254: R_DAC_DCE.1 45.625,79.521 46.36,79.521 U2.24
NetR_DAC_I0_2: R_DAC_I0.2 U2.8 | length 3.3
  Top Layer w0.254: R_DAC_I0.2@50.377,87.647 50.377,86.402 51.308,85.471 51.308,85.176 U2.8
NetR_DAC_I1_2: R_DAC_I1.2 U2.7 | length 3.5
  Top Layer w0.254: R_DAC_I1.2@51.139,87.647 51.139,86.402 51.662,85.879 51.662,84.823 U2.7
NetR_DAC_I2_2: R_DAC_I2.2 U2.6 | length 3.6
  Top Layer w0.254: U2.6 52.028,84.481 R_DAC_I2.2@52.028,87.647
NetR_DAC_I3_2: R_DAC_I3.2 U2.5 | length 4.2
  Top Layer w0.254: U2.5 52.917,84.663 R_DAC_I3.2@52.917,87.647
NetR_DAC_I4_2: R_DAC_I4.2 U2.4 | length 4.8
  Top Layer w0.254: U2.4 53.806,84.845 R_DAC_I4.2@53.806,87.647
NetR_DAC_I5_2: R_DAC_I5.2 U2.3 | length 5.4
  Top Layer w0.254: U2.3 54.695,85.027 R_DAC_I5.2@54.695,87.647
NetR_DAC_I6_2: R_DAC_I6.2 U2.2 | length 5.9
  Top Layer w0.254: U2.2 55.584,85.209 R_DAC_I6.2@55.584,87.647
NetR_DAC_I7_2: R_DAC_I7.2 U2.1 | length 6.5
  Top Layer w0.254: U2.1 56.473,85.391 R_DAC_I7.2@56.473,87.647
NetR_DAC_REF_1: R_DAC_REF.1 U2.32 | length 1.4
  Top Layer w0.254: U2.32 50.923,78.214 50.923,77.635 ; 50.833,77.545 R_DAC_REF.1
NetR_DAC_XN_1: R_DAC_XN.1 U2.26 | length 1.9
  Top Layer w0.254: R_DAC_XN.1 47.062,78.444 47.062,78.808 U2.26
NetR_DAC_XP_1: R_DAC_XP.1 U2.25 | length 1.9
  Top Layer w0.254: R_DAC_XP.1 46.433,79.072 46.618,79.072 U2.25
NetR_REF_IO_1: R_REF_IO.1 U3.45 | length 3.6
  Top Layer w0.254: R_REF_IO.1 58.936,82.415 59.436,81.915 59.436,81.679 U3.45
NetR_REF_IO_2: R_REF_IO.2 U3.46 | length 2.9
  Top Layer w0.254: R_REF_IO.2 58.993,81.415 U3.46
NetU5_6: U5.6 X1.5 | length 3
  Top Layer w0.254: X1.5@80.57,78.859 80.697,78.732 80.84,78.589 U5.6@83.471,78.589
OGND: C19.2 C20.2 U2.17 U3.31 U3.34 | length 5.6
  Top Layer w0.254: v1(45.984,84.011) 46.164,83.832 46.72,83.832 U2.17 ; C20.2 64.897,83.685 v1(64.897,83.185) 65.413,83.185 C19.2 ; v1(65.659,81.026) 65.716,81.026 U3.34 ; v1(66.802,80.01) 66.821,80.01 U3.31
RSSI: P5.4 U1.16 | length 15.2
  Top Layer w0.254: U1.16 55.519,65.424 55.373,65.278 55.373,62.356 57.785,59.944 P5.4@65.786,59.944
RXTX: U1.48 | length 3.7
  Top Layer w0.254: v3@50.419,72.771 50.744,73.096 U1.48
  other v3: 50.038,72.263
SCL: P6.2 R6.2 U5.4 | length 7.9
  Top Layer w0.254: P6.2 84.971,83.558 U5.4
  Top Layer w0.5: R6.2 P6.2
SCLK: P5.3 U1.18 | length 13.4
  Top Layer w0.254: U1.18 56.519,62.48 57.15,61.849 65.151,61.849 P5.3@65.786,62.484
SDA: P6.3 R7.2 U5.5 | length 5.1
  Top Layer w0.254: P6.3 84.471,81.518 U5.5
  Top Layer w0.5: R7.2 P6.3
SHDN: P5.6 U1.12 | length 20.6
  Top Layer w0.254: U1.12 53.269,61.539 59.944,54.864 P5.6@65.786,54.864
V_IN: P7.2 R8.2 U4.4 | length 7.1
  Top Layer w0.254: U4.4@75.231,85.151 75.231,86.233 ; P7.2@75.311,87.757 75.231,87.677 75.231,86.233 ; R8.2 78.232,86.225 75.239,86.225 75.231,86.233
VCC: C6.2 C7.1 C8.1 C9.1 C10.1 C11.1 C12.1 C13.1 C14.1 C15.1 C16.1 C17.1 C18.1 C19.1 C20.1 C21.1 C22.1 C24.1 C25.1 C26.1 C27.1 C28.1 C29.1 C30.1 C31.1 C32.1 C33.1 C34.1 C35.1 R3.2 R4.1 R5.1 R6.1 R7.1 R_ADC_TB.2 R_DAC_DCE.2 U1.1 U1.7 U1.13 U1.17 U1.20 U1.25 U1.27 U1.30 U1.39 U1.41 U1.46 U2.16 U2.27 U2.30 U2.33 U2.39 U3.2 U3.6 U3.11 U3.14 U3.15 U3.32 U3.33 U4.6 U5.10 U5.11 U5.14 U5.18 U5.20 X1.9 | length 416.7
  Top Layer w0.254: C26.1 46.863,84.89 46.863,85.09 45.847,86.106 45.466,86.106 43.815,84.455 ; C26.1@46.618,84.64 U2.16 ; U2.27 47.511,78.55 47.511,77.635 C25.1 48.235,77.45 C27.1@48.673,77.012 ; C27.1@48.673,76.821 C27.1@48.673,77.012 ; U2.33@50.988,78.856 C29.1@51.827,78.017 ; U2.33 50.546,79.298 49.392,78.144 U2.30 48.673,77.591 C27.1@48.673,77.012 ; 51.717,72.354 51.788,72.354 ; 51.816,72.382 51.788,72.354 ; U2.39@53.109,80.978 U2.39 53.752,80.335 C30.1@53.982,80.335 ; U1.7@53.269,69.354 52.684,69.354 52.354,69.684 52.354,70.269 50.897,70.269 50.546,70.62 50.546,71.12 ; U1.1@53.269,72.354 51.788,72.354 ; C15.1 53.983,64.762 54.383,64.362 54.383,62.076 60.706,55.753 67.564,55.753 67.564,60.96 ; C30.1 56.415,80.237 ; C15.1@54.019,64.806 U1.13@54.019,66.104 ; U1.46@55.019,73.104 55.019,73.894 54.237,74.676 53.086,74.676 52.84,74.43 R4.1 C34.1 51.808,73.696 51.562,73.45 49.574,73.45 48.895,72.771 48.895,71.755 49.53,71.12 50.546,71.12 ; U1.17@56.019,66.104 56.019,62.345 57.785,60.579 61.468,60.579 61.849,60.96 67.564,60.96 ; C33.1@57.519,64.774 U1.20@57.519,66.104 ; U1.41@57.519,73.104 C12.1@57.519,75.192 ; C33.1 57.793,64.762 58.165,64.39 58.165,63.374 58.547,62.992 63.881,62.992 64.77,63.881 64.77,65.278 65.278,65.786 67.564,65.786 ; C12.1 58.401,74.449 C11.1 v1(58.519,74.013) U1.39@58.519,73.104 ; 58.174,74.684 59.436,75.946 59.563,75.946 ; C22.1 58.801,76.708 ; 59.317,60.714 C14.1 ; U1.25 61.051,66.846 C13.1 61.73,66.739 ; U1.27 61.059,67.846 61.341,67.564 ; U1.30@60.281,69.342 C16.1 61.73,68.953 61.876,68.807 63.727,68.807 64.135,69.215 64.135,71.501 ; U3.2 59.929,75.946 59.563,75.946 ; C24.1 v1(61.187,74.014) 61.187,74.376 U3.6 ; C10.1 61.73,66.739 ; U3.11 63.111,72.764 C17.1 63.627,72.009 64.135,71.501 ; U3.14 67.183,72.518 67.183,71.189 C18.1 ; U3.15 67.818,72.59 67.818,71.811 C21.1 ; U3.33 68.226,82.829 67.017,84.039 C19.1 C20.1 ; U3.32 68.563,82.458 68.563,83.194 66.921,84.836 66.048,84.836 C20.1 ; C21.1@68.233,71.385 C18.1 ; 73.152,78.097 73.914,78.859 73.152,79.621 ; U4.6 74.615,83.251 73.922,82.558 R3.2 ; R5.1 R6.1 R7.1 80.145,81.915 74.422,81.915 73.922,81.415 R3.2 ; v1(81.661,73.406) 72.517,73.406 ; U5.10@83.471,76.589 83.185,76.303 C9.1 83.82,74.414 ; U5.11@84.455,75.573 C8.1 83.82,74.414 ; U5.14@85.979,75.581 C7.1 86.241,74.414 86.868,73.787 v1(86.868,73.406) 88.265,73.406 ; U5.20@87.471,78.589 87.622,78.74 C28.1 C6.2 88.654,73.795 ; 43.815,84.455 37.465,90.805 37.465,93.345 52.07,93.345 ; 43.815,84.455 43.815,78.161 46.919,75.057 C27.1 C27.1@48.673,77.012 ; 50.546,71.12 51.181,71.755 51.189,71.755 51.788,72.354 ; 52.07,93.345 50.673,94.742 50.673,97.917 51.181,98.425 71.501,98.425 72.009,97.917 72.009,94.361 70.993,93.345 ; 52.07,93.345 57.531,93.345 57.785,93.091 57.785,90.805 57.277,90.297 57.277,81.915 56.515,81.153 56.515,79.629 57.531,78.613 57.531,77.343 58.166,76.708 58.801,76.708 ; 58.801,76.708 59.563,75.946 ; 61.73,66.739 63.818,66.739 64.135,67.056 64.135,67.818 64.897,68.58 66.682,68.58 67.564,67.698 ; 64.135,71.501 66.167,69.469 66.802,69.469 67.818,68.453 81.28,68.453 82.931,70.104 82.931,71.374 83.82,72.263 v1(83.82,73.338) 83.82,74.414 ; C20.1 65.532,84.773 65.532,90.297 65.024,90.805 65.024,93.091 65.278,93.345 70.993,93.345 ; 67.564,60.96 67.564,65.786 ; 67.564,65.786 67.564,67.698 ; 67.564,67.698 86.113,67.698 88.265,69.85 88.265,73.406 ; C18.1 67.437,70.589 67.437,69.977 68.199,69.215 69.215,69.215 72.517,72.517 72.517,73.406 ; 70.993,93.345 85.344,93.345 91.313,87.376 91.313,76.454 88.654,73.795 ; 72.517,73.406 72.517,78.986 73.152,79.621 ; 73.152,79.621 73.152,80.645 73.787,81.28 R3.2 ; 88.265,73.406 88.654,73.795
  Bottom Layer w0.254: v1(58.519,74.013) v1(58.519,74.013) v1(61.187,74.014) ; v1(81.661,73.406) v1(86.868,73.406)
pads on no net: L1.6 U1.29 U2.9 U2.10 U2.11 U2.12 U2.13 U2.14 U2.15 U2.18 U2.19 U2.20 U2.21 U2.22 U2.23 U3.29 U3.30 U3.35 U3.36 U4.3 U4.5 U5.8 U5.15 U5.16 U5.17 U5.19 X1.1 X1.2 X1.3 X1.6 X1.7

## Polygon pours and split planes (outlines as drawn)
GND on Bottom Layer "Bottom Layer-No Net" (solid, pour order 26): 52.705,81.915 28.956,81.915 28.956,62.103 46.228,62.103 56.261,52.07 73.787,52.07 73.914,52.07 92.583,70.739 92.583,86.995 91.186,88.392 74.295,88.392 73.406,87.503 73.406,84.201 73.406,82.931 72.39,81.915 72.39,75.565 71.501,74.676 70.993,74.676 69.596,74.676 65.659,78.613 64.77,79.502 61.976,79.502 59.563,81.915 54.229,81.915
OGND on Bottom Layer "Bottom Layer-No Net" (solid, remove dead copper, pour order 28): 92.583,89.535 92.583,86.995 91.186,88.392 74.295,88.392 73.406,87.503 73.406,82.931 72.39,81.915 72.39,75.565 71.501,74.676 69.596,74.676 64.77,79.502 61.976,79.502 59.563,81.915 28.956,81.915 28.956,89.916 38.354,99.314 82.804,99.314
GND on Top Layer "Top Ground" (solid, pour order 32): 46.228,62.103 49.276,62.103 53.975,66.802 53.975,69.977 50.419,69.977 46.482,73.914 28.956,73.914 28.956,89.916 38.354,99.314 82.804,99.314 92.583,89.535 92.583,70.739 73.914,52.07 56.261,52.07

## Other copper
Top Layer:
  region net VCC: 70.866,70.866 70.231,70.866 69.723,71.374 69.469,71.12 69.977,70.612 69.977,70.104
  region net ANT2_N: 53.666,67.973 52.874,67.973 52.834,67.934 47.958,67.934 47.959,67.932 47.959,67.322 48.647,66.634 51.772,66.634 52.868,67.73 52.88,67.718 53.654,67.718
  region net ANT2_P: 53.672,68.217 52.874,68.217 52.858,68.234 47.951,68.234 47.947,68.238 47.947,68.85 48.63,69.534 51.795,69.534 52.868,68.461 53.666,68.461
  region net ANT2_BB_P: 47.612,68.242 40.729,68.242 40.722,68.249 40.722,69.083 41.184,69.545 46.993,69.545 47.609,68.928
  region net ANT2_BB_N: 47.612,67.942 40.729,67.942 40.729,67.086 40.722,67.079 41.157,66.644 41.412,66.644 41.419,66.65 47.047,66.65 47.609,67.213
  region net NetC1_2: 36.363,68.392 37.564,69.594 37.918,69.594 39.79,67.722 39.79,67.081 39.525,67.081 39.517,67.088 39.019,66.589 37.687,66.589 36.363,67.913
  region net NetC1_1: 35.97,68.406 34.786,69.589 32.833,69.589 32.168,68.924 32.176,68.916 32.176,67.4 32.987,66.589 34.657,66.589 35.97,67.903
  region net VCC: 53.721,69.215 52.451,69.215 51.689,69.977 50.419,69.977 48.768,71.628 48.768,72.136 49.022,72.136 49.022,71.882 49.657,71.247 50.419,71.247 50.673,70.993 50.673,70.493 50.897,70.269 50.986,70.358 52.197,70.358 52.578,69.977 52.578,69.723 52.832,69.469 53.721,69.469
  region net VCC: 75.565,83.439 73.914,83.439 73.914,83.418 72.39,81.894 72.39,77.724 73.406,77.724 74.041,78.359 75.311,78.359 75.311,79.629 74.295,80.645 74.295,81.661 74.422,81.788 80.645,81.788 81.026,82.169 81.026,87.757 80.391,87.757 80.391,82.931 79.756,82.296 76.2,82.296 75.565,82.931
  region net V_IN: 79.502,84.836 79.502,85.471 78.613,86.36 76.835,86.36 75.946,87.249 74.549,87.249 74.549,85.217 74.93,84.836 75.565,84.836 75.565,85.598 75.692,85.725 78.105,85.725 78.994,84.836
  region net GND: 88.011,86.487 88.011,85.217 87.249,84.455 86.233,84.455 86.233,82.931 87.503,82.931 87.503,84.074 88.392,84.963 89.281,84.963 89.281,86.487
  region net VCC: 87.122,78.74 87.376,78.994 89.027,78.994 89.027,77.216 88.265,77.216 88.011,77.47 87.122,77.47 87.122,77.724 87.884,77.724 88.138,77.978 88.138,78.232 87.884,78.486 87.122,78.486
  region net VCC: 85.852,75.946 85.852,74.803 85.725,74.676 85.725,74.041 86.233,74.041 86.487,73.787 86.487,73.406 87.884,72.009 87.884,69.977 85.725,67.818 68.072,67.818 68.072,67.31 86.36,67.31 86.36,67.437 88.773,69.85 88.773,73.025 91.694,75.946 91.694,76.454 91.313,76.835 91.186,76.835 91.186,76.454 89.789,75.057 89.535,75.057 89.027,75.565 89.027,77.216 88.265,77.216 88.392,77.089 88.392,74.041 88.011,73.66 87.503,73.66 86.106,75.057 86.106,75.946
  region net VCC: 72.39,77.724 72.39,72.771 69.088,69.469 68.199,69.469 67.691,69.977 67.691,70.358 68.707,71.374 68.199,71.882 67.056,70.739 67.056,70.104 68.072,69.088 69.596,69.088 73.66,73.152 81.661,73.152 81.661,73.66 73.279,73.66 72.771,74.168 72.771,77.343 73.152,77.724 72.771,77.978
  region net VCC: 58.674,72.771 58.674,73.787 59.309,74.422 59.309,74.549 58.928,74.93 58.928,75.184 59.563,75.819 60.071,75.819 61.087,76.835 60.833,77.089 59.817,76.073 59.69,76.073 59.055,76.708 59.055,77.597 57.277,77.597 57.277,77.343 58.42,76.2 58.42,75.819 58.166,75.565 57.404,75.565 57.404,73.279 57.658,73.279 57.658,73.66 57.785,73.787 58.166,73.787 58.293,73.66 58.293,72.771
  region net VCC: 66.548,81.407 67.691,82.55 67.691,83.058 66.929,83.82 66.548,83.82 66.294,83.566 66.167,83.566 65.278,84.455 65.278,84.582 65.659,84.963 67.056,84.963 68.834,83.185 68.834,82.423 67.183,80.772
  region net VCC: 65.786,73.66 67.056,72.39 67.056,70.739 67.627,70.168 67.691,70.168 67.691,70.358 68.707,71.374 67.945,72.136 67.945,72.644 66.421,74.168
  region net VCC: 61.341,67.564 61.341,66.04 61.595,65.786 61.976,65.786 62.103,65.913 62.103,66.421 62.23,66.548 62.23,66.929 62.103,67.056 62.103,67.564 61.976,67.691 61.468,67.691
  region net VCC: 47.244,83.82 46.99,84.074 46.482,84.074 46.101,84.455 46.101,84.709 46.609,85.217 46.99,85.217 47.117,85.09 47.117,84.455 47.498,84.074
  region net VCC: 54.102,79.756 54.483,80.137 55.626,80.137 57.277,78.486 57.277,77.597 58.039,77.597 57.658,77.978 57.658,78.74 56.642,79.756 56.642,81.026 57.785,82.169 57.785,90.805 57.404,90.805 57.023,90.424 57.023,82.55 55.245,80.772 53.975,80.772 53.467,80.264 53.975,79.756
  region net VCC: 57.404,66.421 57.404,65.659 57.277,65.532 57.277,64.516 57.785,64.516 57.785,65.532 57.658,65.659 57.658,66.421
  region net VCC: 54.102,64.516 54.102,66.421 53.848,66.421 53.848,65.405 53.594,65.151 53.594,64.516
  region net VCC: 66.548,65.913 66.929,65.913 67.437,66.421 67.691,66.421 67.691,65.024 67.437,65.024 67.437,65.151 66.929,65.659 66.548,65.659
  region net VCC: 59.182,61.087 58.674,60.579 59.944,60.579 59.436,61.087
  region net VCC: 66.929,61.087 67.437,61.595 67.437,60.325 66.929,60.833
  region net VCC: 67.437,56.896 66.294,55.753 67.437,55.753 67.564,55.88
  region net VCC: 68.072,67.31 67.691,66.929 67.691,67.571 67.564,67.698 68.199,67.698
  region net VCC: 50.546,95.123 50.546,94.107 49.784,93.345 52.07,93.345 50.673,94.742
  region net VCC: 72.136,94.615 72.136,94.006 72.797,93.345 70.993,93.345
  region net VCC: 91.694,76.454 91.694,86.995 91.313,87.376 91.313,76.454
  region net VCC: 44.45,85.217 43.053,85.217 43.815,84.455
  region net VCC: 46.284,75.692 47.554,75.692 46.919,75.057
  region net VCC: 47.244,77.089 47.371,76.962 48.387,76.962 48.768,76.581 48.768,77.495 48.628,77.635 47.511,77.635
  region net VCC: 44.717,78.613 44.704,78.6 44.704,78.034 44.323,77.653 43.815,78.161 43.815,78.232 44.196,78.613
  region net VCC: 52.578,74.295 51.816,74.295 51.816,74.041 52.07,73.787 52.705,73.787
  region net VCC: 65.278,84.519 65.024,84.772 65.024,90.805 65.532,90.297 65.532,84.455
  region net VCC: 46.609,75.367 46.609,75.184 48.895,72.898 48.895,72.771 49.574,73.45 49.542,73.45 47.427,75.565
  text "SHERPA" at 31.877,80.01 h1.52
  text "MK I" at 31.877,77.851 h1.52